# EAGLE board MD9600 Radio (EAGLE 7.7.0)
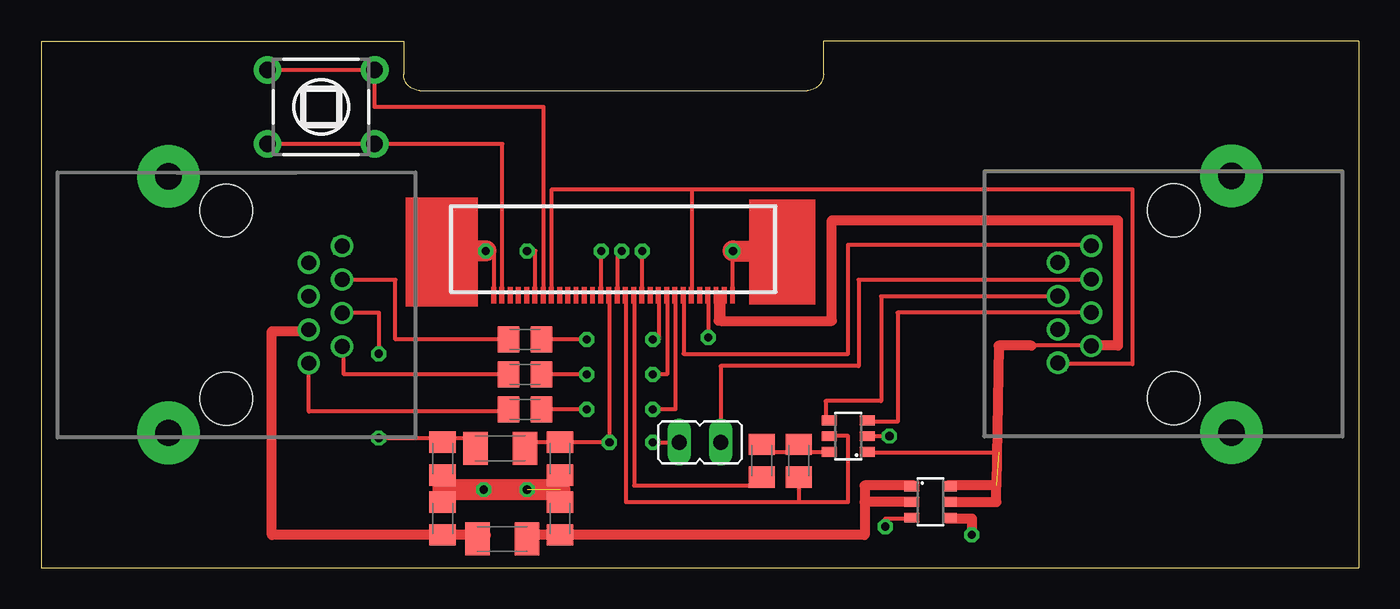
[diagram p0: board, top side]
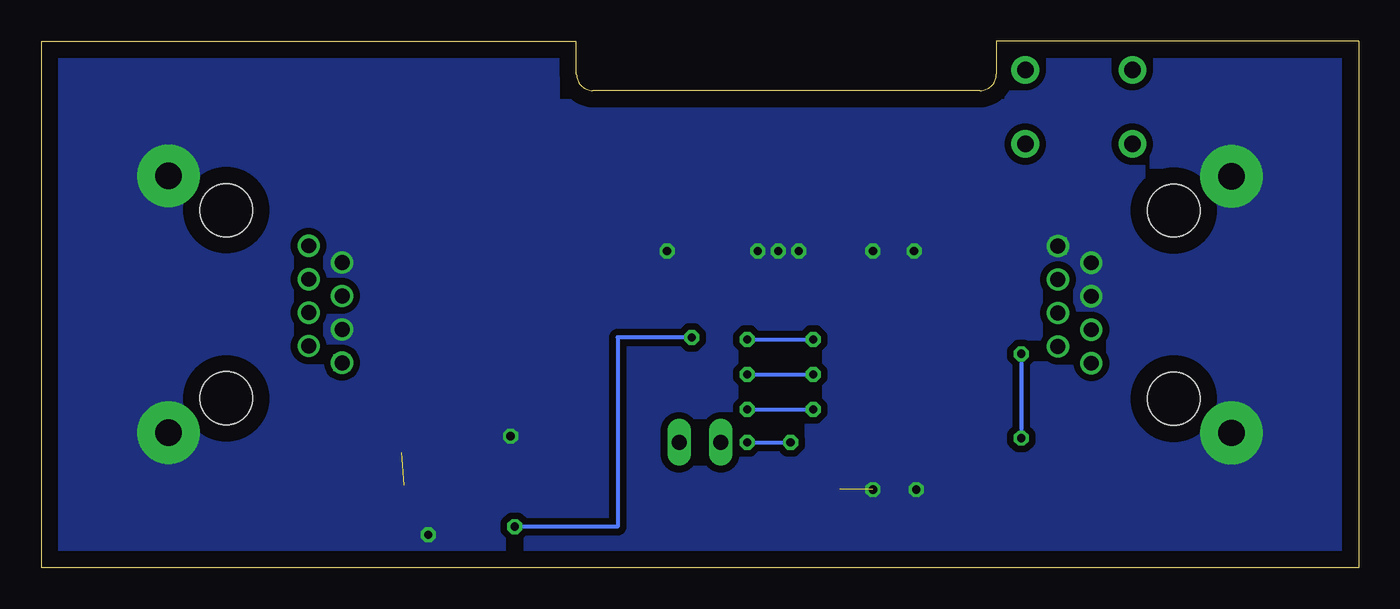
[diagram p1: board, bottom side, seen from below]

Size 80 x 32 mm. Coordinates in mm from the lower left corner, seen from the top.
Outline: 0,0 80,0 80,32 47.5,32 47.5,30 arc-90 46.5,29 23,29 arc-90 22,30 22,32 0,32 0,0
Copper layers (1*16): Top 0.035mm / dielectric 1.5mm / Bottom 0.035mm
Design rules "default": minimum track width 10mil, minimum drill 24mil, track to track 8mil, track to pad 8mil, pad to pad 8mil, via to via 8mil, smd to smd 8mil, copper to edge 40mil, drill to drill 8mil, minimum pad ring 10mil, minimum via ring 8mil, stop-mask expansion 4mil, vias tented up to drill 0mil, thermal gap 10mil
Holes 3.2 mm at 11.24,21.7 11.24,10.27 68.76,10.3 68.76,21.73

## Footprints (pad centres in the part's own frame; a part is rotated, then mirrored left to right if it is on the bottom)
C0805K = smd 1.3 x 1.6: 1 -1,0; 2 1,0
TL1105T = drill 1 pad 1.676: 1 -2.25,3.25; 2 2.25,3.25; 3 -2.25,-3.25; 4 2.25,-3.25
SOT23-6 = smd 0.6 x 0.9: 1 -0.95,-1.15; 2 0,-1.15; 3 0.95,-1.15; 4 0.95,1.15; 5 0,1.15; 6 -0.95,1.15
JP1 = drill 0.914 long: 1 0,-1.27; 2 0,1.27
C1206K = smd 1.5 x 2: 1 -1.5,0; 2 1.5,0

## Placement (x,y rotation side)
C1  100P  [C0805K]  31.5,6.62 90 top
C2  100P  [C0805K]  24.38,6.62 90 top
C3  100n  [C0805K]  24.38,3 270 top
C4  100n  [C0805K]  31.5,3 270 top
E$1  [TL1105T]  17,28 90 top
E$2  [SOT23-6]  54,4 270 top
E$11  [JP1]  40,7.62 90 top
E$12  [SOT23-6]  49,8 90 top
FB1  FB  [C1206K]  27.88,7.25 0 top
FB2  FB  [C1206K]  28,1.75 0 top
R1  1K  [C0805K]  29.38,13.88 0 top
R2  1K  [C0805K]  29.38,11.75 0 top
R3  1K  [C0805K]  29.38,9.62 0 top
R4  SOT  [C0805K]  43.75,6.5 90 top
R5  SOT  [C0805K]  46,6.5 270 top

## Library data of the parts
C1-C4 R1-R3 = ref-packages-longpad
E$1 = switch
E$2 E$12 = microchip
E$11 = jumper
FB1 FB2 R4 R5 = resistor

## Nets
GND: C3.1
S$21: R2.1

## Tracks (layer width: path | path; a pad name or v marks a point on that pad's centre or on a via)
GND  (via drill 0.5 pad 0.25, 0.6, 0.9, 1.6 pad 3.81)  (1 unrouted)
  Top 0.254: 27.5,16.75 27.5,19.25 v27,19.25 | 30,16.88 30,19.25 v29.5,19.25 | 34,16.75 v34,19.25 | 36.5,16.75 v36.5,19.25 | 42,16.75 v42,19.25 | 35,16.75 35,19.25 v35.25,19.25
  Top 0.61: 55,3 56.5,3 v56.5,2
  Top 1.27: v27,19.25 25.62,19.25 | v42,19.25 43.88,19.25 | 24.38,5.5 C3.1 24.75,4.75 31.5,4.75
  other vias: 7.73,8.19 7.73,23.79 61.73,14.49 61.73,18.55 72.27,23.81 72.27,8.21 26.88,4.75 29.5,4.75 18.27,19.55 18.25,19.55 16.24,18.53 16.24,16.5 51.5,8
  pour Bottom (isolate 0.406, no thermals): 1,31 21,31 21,28 49,28 49,31 79,31 79,1 1,1
S$1
  Top 0.254: 28.25,13.88 21.5,13.88 21.5,17.5 18.38,17.5
S$2  (via drill 0.6)
  other vias: 61.75,12.45
S$3  (via drill 0.9)
  other vias: 61.73,12.46
S$4
  Top 0.254: 63.75,15.5 52,15.5 52,8.88 50.12,8.88
S$5  (via drill 0.9)
  other vias: 61.73,16.52
S$6  (via drill 0.5 pad 0.25)
  Top 0.254: 38.5,16.25 38.5,9.62 v37.12,9.62 | v33.12,9.62 30.62,9.62
  Bottom 0.254: v37.12,9.62 v33.12,9.62
S$7  (via drill 0.9)
  other vias: 63.76,13.47
S$8  (via drill 0.9)
  other vias: 63.76,15.5
S$9  (via drill 0.9)
  other vias: 63.76,17.54
S$10  (via drill 0.9)
  other vias: 63.76,19.57
S$11
  Top 0.254: 39,16.5 39,13 49,13 49,19.62 63.75,19.62
S$12  (via drill 0.5 pad 0.25)
  Top 0.254: 38,16.38 38,11.75 v37.12,11.75 | v33.12,11.75 30.88,11.75
  Bottom 0.254: v37.12,11.75 v33.12,11.75
S$13
  Top 0.254: 30.5,16.62 30.5,28 20.25,28 20.25,30.25 14,30.25
S$14
  Top 0.254: 28,16.75 28,25.75 13.62,25.75
S$15
  Top 0.254: 63.75,17.5 49.62,17.5 49.62,12.25 41.25,12.25 41.25,7.62
S$16
  Top 0.254: 31,16.75 31,23 39.5,23 | 39.5,23 39.5,16.75 | 39.5,23 66.25,23 66.25,12.38 61.75,12.38
S$17
  Top 0.254: 61.75,16.5 51,16.5 51,10.12 47.62,10.12 47.62,9
S$18  (1 unrouted)
  Top 0.254: 41.12,15 41.25,15 | 63.75,13.5 60.12,13.5 | 50.38,7 58.12,7
  Top 0.61: 41.12,16.5 41.12,15 | 41.25,16.38 41.25,15 48,15 48,21.12 65.38,21.12 65.38,13.5 63.75,13.5 | 60.12,13.5 58.12,13.5 58,5 55,5
S$19  (via drill 0.5 pad 0.25)
  Top 0.254: 37.5,16.25 37.5,13.88 v37.12,13.88 | v33.12,13.88 30.75,13.88
  Bottom 0.254: v37.12,13.88 v33.12,13.88
S$20
  Top 0.61: 27,2 14,2 14,14.38 16.25,14.38
S$21
  Top 0.254: R2.1 18.38,11.75 18.38,13.25 18.38,13.38
S$22
  Top 0.254: 31.5,5.5 31.38,5.5
S$23
  Top 0.254: 28.38,9.5 16.25,9.5 16.25,12.25
S$24  (via drill 0.5 pad 0.25)
  Top 0.254: 18.25,15.5 20.5,15.5 v20.5,13 | 26.88,7.88 v20.5,7.88
  Bottom 0.254: v20.5,13 v20.5,7.88
S$25  (via drill 0.5 pad 0.25)
  Top 0.254: 34.5,16.5 v34.5,7.62 29.12,7.62 29.12,7.38 | v37.12,7.62 38.75,7.62
  Bottom 0.254: v37.12,7.62 v34.5,7.62
S$26
  Top 0.254: 36,16.5 36,5 43.75,5
S$27
  Top 0.254: 47.88,7 43.75,7
S$28
  Top 0.254: 35.5,16.5 35.5,4 46,4 | 46,4 49,4 49,8 47.88,8 | 46,5.25 46,4
S$29
  Top 0.61: 53,5 50,5 50,4 | 50,4 50,2 30,2 | 53,4 50,4
S$30
  Top 0.254: 50.25,8 51.5,8
S$31
  Top 0.61: 55.12,4 58,4 58,5.12
S$32  (via drill 0.5 pad 0.25)
  Top 0.254: 40.5,16.62 v40.5,14 | v51.25,2.5 51.25,3 53,3
  Bottom 0.254: v40.5,14 45,14 45,2.5 v51.25,2.5
S$40  (via drill 0.9)
  other vias: 18.27,17.51
S$41  (via drill 0.9)
  other vias: 18.27,15.48
S$42  (via drill 0.9)
  other vias: 18.27,13.45
S$45  (via drill 0.9)
  other vias: 16.24,14.46
S$46  (via drill 0.9)
  other vias: 16.24,12.43
(copper drawn outside any net)
  shapes: Top area x32

## Text on the board
Document: OpenMD9600 Remote | DFU-- | G4EML | RADIO | JP1 | MIC | HEAD